# EAGLE board PCB_VARIABLE_DC_SUPPLY_ (EAGLE 9.6.2)
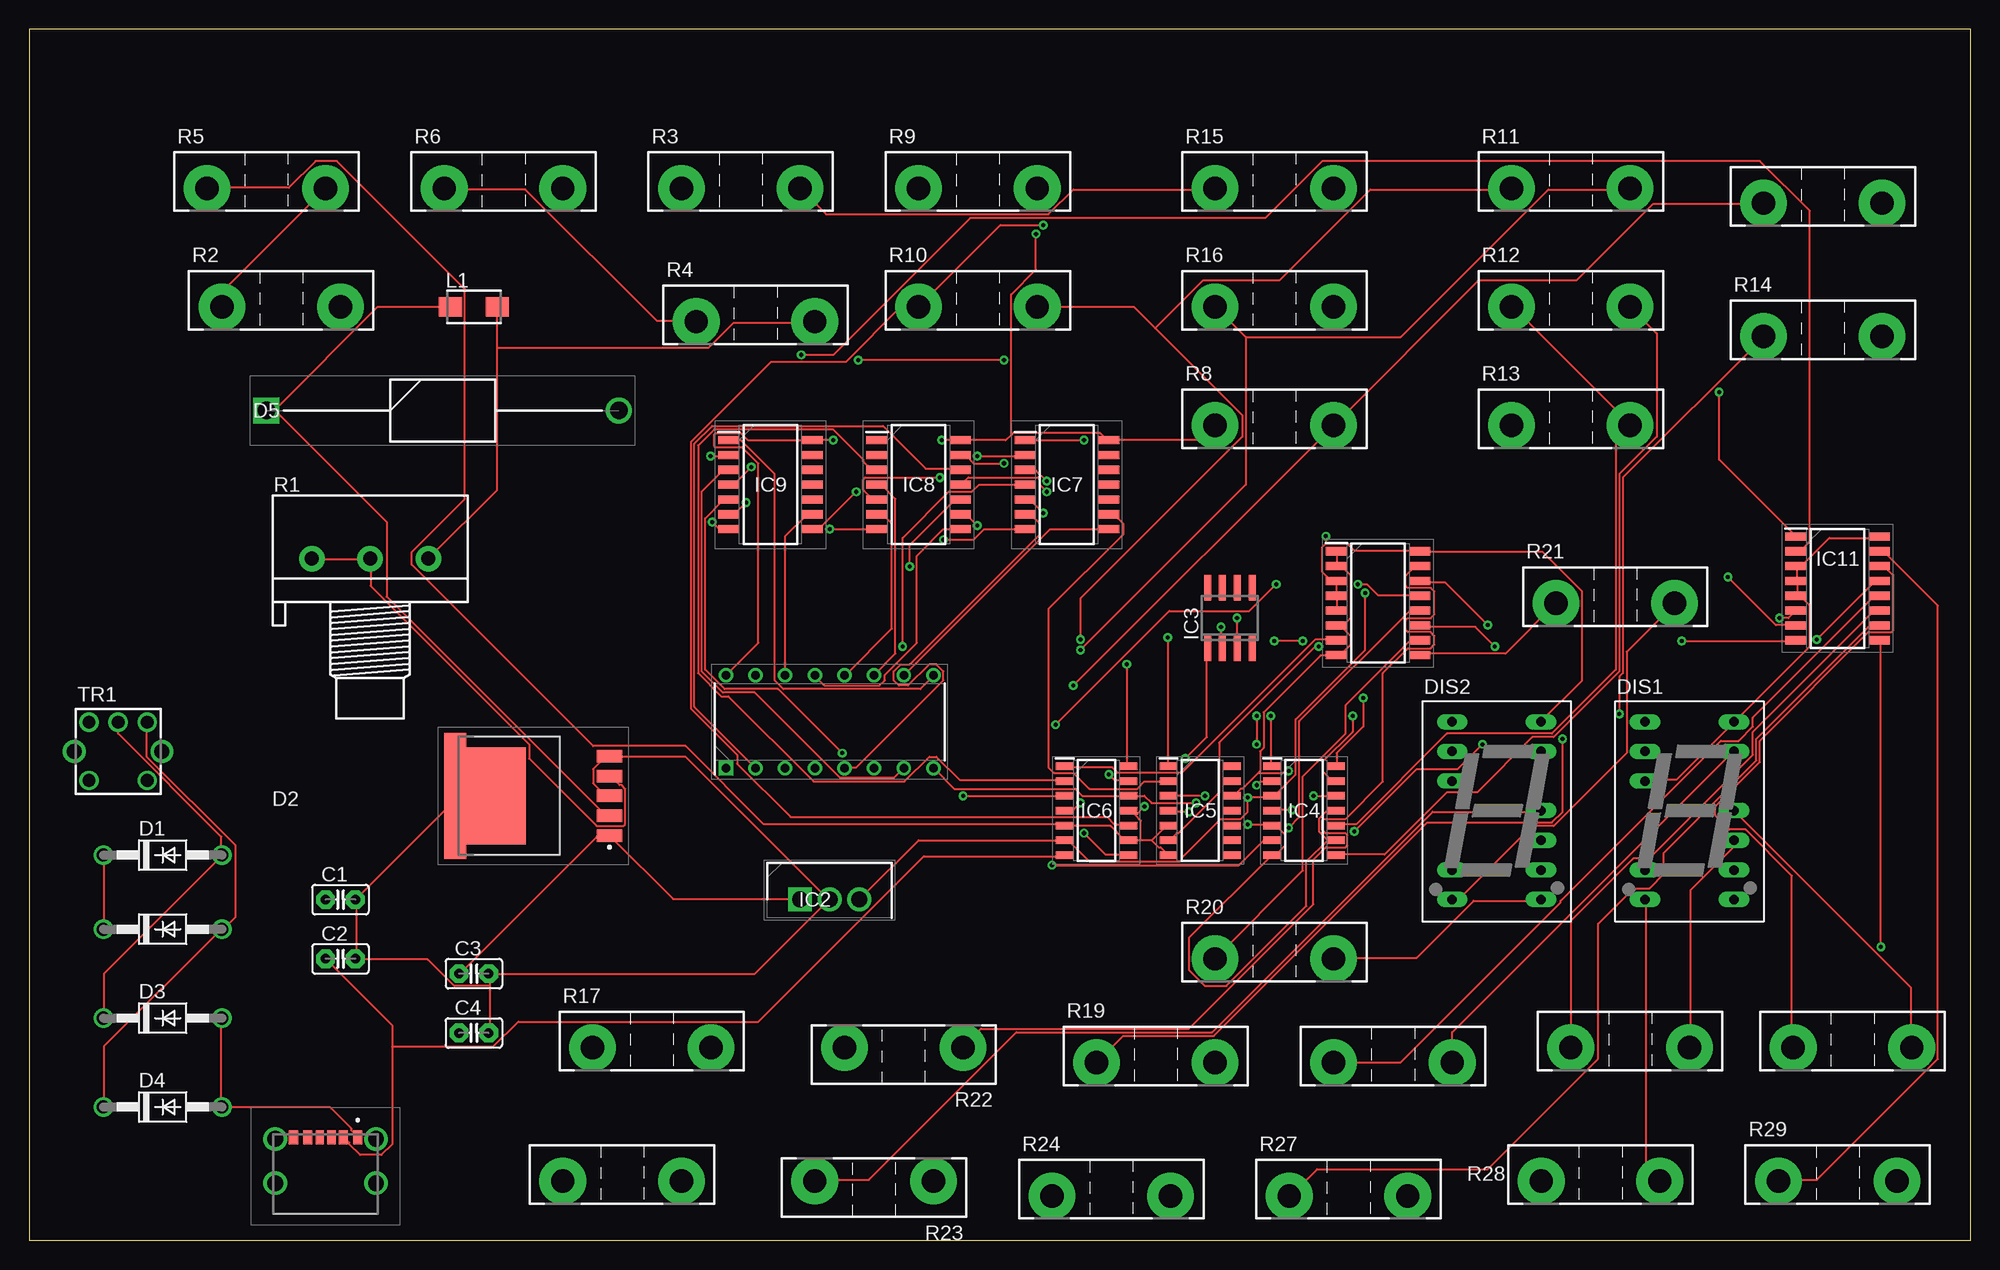
[diagram p0: board, top side]
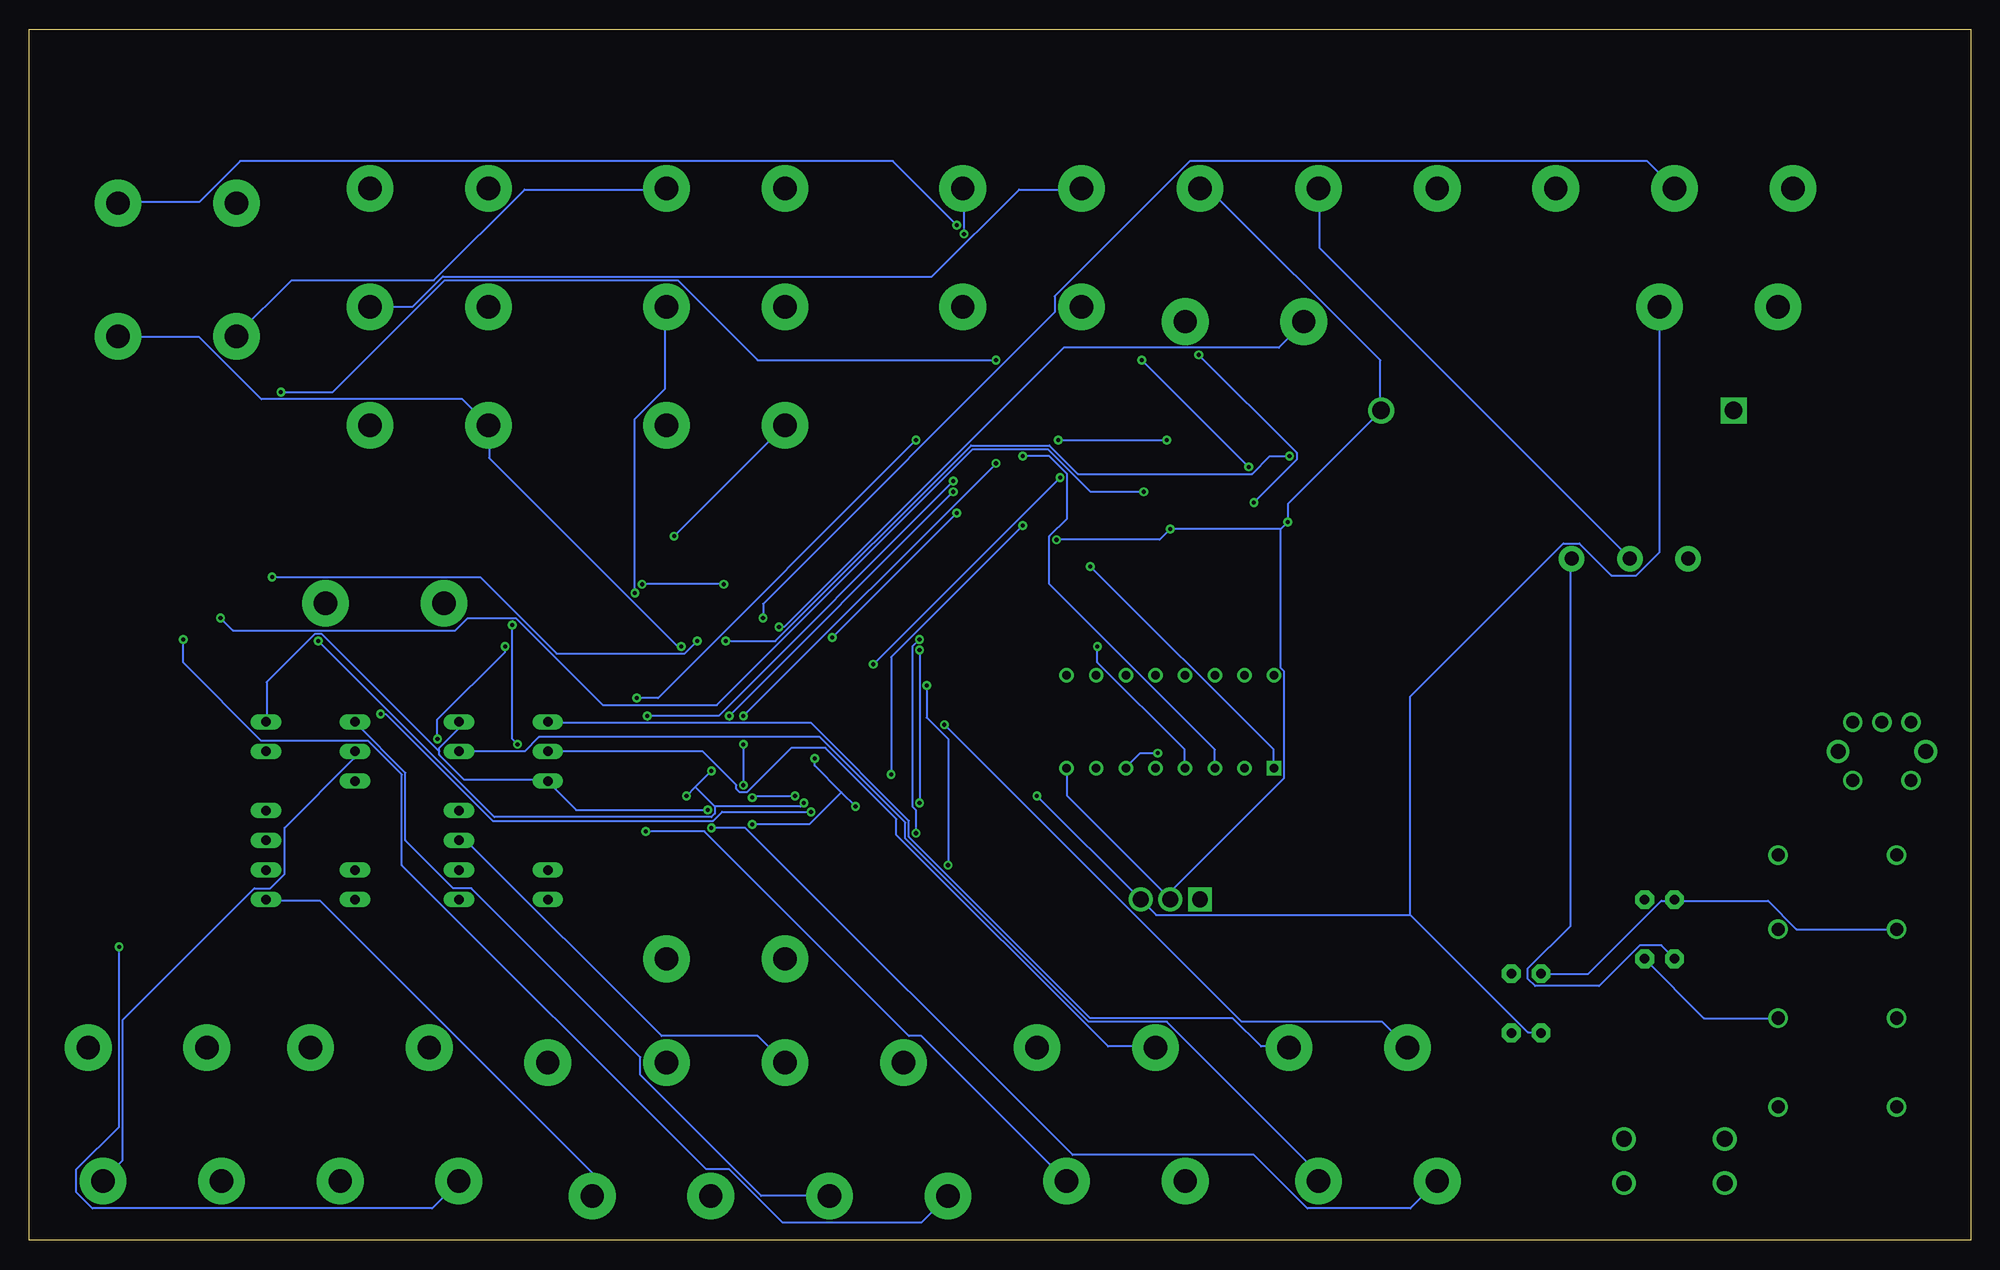
[diagram p1: board, bottom side, seen from below]

Size 166.35 x 103.81 mm. Coordinates in mm from the lower left corner, seen from the top.
Outline: 0,0 166.35,0 166.35,103.81 0,103.81 0,0
Copper layers (1*16): Top 0.035mm / dielectric 1.5mm / Bottom 0.035mm
Design rules "default": minimum track width 6mil, minimum drill 0.35mm, track to track 6mil, track to pad 6mil, pad to pad 6mil, via to via 6mil, smd to smd 6mil, copper to edge 40mil, drill to drill 6mil, minimum pad ring 10mil, minimum via ring 8mil, stop-mask expansion 4mil, vias tented up to drill 0mil, thermal gap 10mil

## Footprints (pad centres in the part's own frame; a part is rotated, then mirrored left to right if it is on the bottom)
C2.5-2 = drill 0.813 pad 1.6 octagon: 1 -1.27,0; 2 1.27,0
DO41-10 = drill 1.118: A 5.08,0; C -5.08,0
DIOAD3020W130L900D530 = drill 1.5 pad 2.25 square: 1 0,0 | drill 1.5 pad 2.25: 2 30.2,0
HDSP-I = drill 0.813 long: 1 -3.81,7.62; 2 -3.81,5.08; 3 -3.81,2.54; 6 -3.81,-5.08; 7 -3.81,-7.62; 8 3.81,-7.62; 9 3.81,-5.08; 10 3.81,-2.54; 11 3.81,0; 13 3.81,5.08; 14 3.81,7.62
LM2596SXADJ = smd 2.16 x 1.07: 1 6.545,-3.4; 2 6.545,-1.7; 3 6.545,0; 4 6.545,1.7; 5 6.545,3.4 | smd 1.91 x 10.8: T1 -6.67,0 | smd 5.08 x 8.33: T2 -3.175,0
TO254P470X1016X2019-3P = drill 1.37 pad 2.055 square: 1 0,0 | drill 1.37 pad 2.055: 2 2.535,0; 3 5.07,0
SO08 = smd 0.6 x 2.2: 1 -1.905,-2.6; 2 -0.635,-2.6; 3 0.635,-2.6; 4 1.905,-2.6; 5 1.905,2.6; 6 0.635,2.6; 7 -0.635,2.6; 8 -1.905,2.6
SOIC127P600X175-14N = smd 1.525 x 0.65: 1 -2.712,3.81; 2 -2.712,2.54; 3 -2.712,1.27; 4 -2.712,0; 5 -2.712,-1.27; 6 -2.712,-2.54; 7 -2.712,-3.81; 8 2.712,-3.81; 9 2.712,-2.54; 10 2.712,-1.27; 11 2.712,0; 12 2.712,1.27; 13 2.712,2.54; 14 2.712,3.81
SOIC127P780X200-14N = smd 1.825 x 0.7: 1 -3.562,3.81; 2 -3.562,2.54; 3 -3.562,1.27; 4 -3.562,0; 5 -3.562,-1.27; 6 -3.562,-2.54; 7 -3.562,-3.81; 8 3.562,-3.81; 9 3.562,-2.54; 10 3.562,-1.27; 11 3.562,0; 12 3.562,1.27; 13 3.562,2.54; 14 3.562,3.81
DIP794W53P254L1930H508Q16N = drill 0.73 pad 1.13 square: 1 -3.97,8.89 | drill 0.73 pad 1.13: 2 -3.97,6.35; 3 -3.97,3.81; 4 -3.97,1.27; 5 -3.97,-1.27; 6 -3.97,-3.81; 7 -3.97,-6.35; 8 -3.97,-8.89; 9 3.97,-8.89; 10 3.97,-6.35; 11 3.97,-3.81; 12 3.97,-1.27; 13 3.97,1.27; 14 3.97,3.81; 15 3.97,6.35; 16 3.97,8.89
SOIC127P780X200-16N = smd 1.825 x 0.7: 1 -3.562,4.445; 2 -3.562,3.175; 3 -3.562,1.905; 4 -3.562,0.635; 5 -3.562,-0.635; 6 -3.562,-1.905; 7 -3.562,-3.175; 8 -3.562,-4.445; 9 3.562,-4.445; 10 3.562,-3.175; 11 3.562,-1.905; 12 3.562,-0.635; 13 3.562,0.635; 14 3.562,1.905; 15 3.562,3.175; 16 3.562,4.445
TYPEC31M17 = smd 0.7 x 1.2: A5 -0.5,2.5; B5 0.5,2.5 | smd 0.76 x 1.2: A9 1.52,2.5; B9 -1.52,2.5 | smd 0.8 x 1.2: A12 2.75,2.5; B12 -2.75,2.5 | drill 1.346 pad 2: MH1 -4.32,-1.45; MH2 4.32,-1.45; MH3 4.32,2.35; MH4 -4.32,2.35
SM-B5 = smd 2 x 1.7: 1 -2,0; 2 2,0
3RP/1610N = drill 1.2 pad 2.184: 1 -5,0; 2 0,0; 3 5,0
TO-247-2V = drill 2 pad 4: 1 -5.08,0; 2 5.08,0
71-5 = drill 1.1: 1 2.5,-2.5; 2 2.5,2.5; 3 0,2.5; 4 -2.5,2.5; 5 -2.5,-2.5 | drill 1.3: S1 -3.75,0; S2 3.75,0

## Placement (x,y rotation side)
C1  4700 uF  [C2.5-2]  26.67,29.21 0 top
C2  220 uF  [C2.5-2]  26.67,24.13 0 top
C3  330 nF  [C2.5-2]  38.1,22.86 0 top
C4  100 nF  [C2.5-2]  38.1,17.78 0 top
D1  1N4004  [DO41-10]  11.43,33.02 0 top
D2  1N4004  [DO41-10]  11.43,26.67 0 top
D3  1N4004  [DO41-10]  11.43,19.05 0 top
D4  1N4004  [DO41-10]  11.43,11.43 0 top
D5  IN5822  [DIOAD3020W130L900D530]  20.32,71.12 0 top
DIS1  HD-E101  [HDSP-I]  142.24,36.83 0 top
DIS2  HD-E101  [HDSP-I]  125.73,36.83 0 top
IC1  LM2596SX-ADJ  [LM2596SXADJ]  43.18,38.1 0 top
IC2  LM7810ACT  [TO254P470X1016X2019-3P]  66.04,29.21 0 top
IC3  LM4558D  [SO08]  102.87,53.34 0 top
IC4  LM339D  [SOIC127P600X175-14N]  109.22,36.83 0 top
IC5  LM339D  [SOIC127P600X175-14N]  100.33,36.83 0 top
IC6  LM339D  [SOIC127P600X175-14N]  91.44,36.83 0 top
IC7  SN74HC04NSR  [SOIC127P780X200-14N]  88.9,64.77 0 top
IC8  SN74HC04NSR  [SOIC127P780X200-14N]  76.2,64.77 0 top
IC9  SN74HC04NSR  [SOIC127P780X200-14N]  63.5,64.77 0 top
IC10  SN74HC147N  [DIP794W53P254L1930H508Q16N]  68.58,44.45 90 top
IC11  SN74LS47NSRE4  [SOIC127P780X200-16N]  154.94,55.88 0 top
IC12  SN74LS47NSRE4  [SOIC127P780X200-16N]  115.57,54.61 0 top
J1  TYPE-C-31-M-17  [TYPEC31M17]  25.4,6.35 0 top
L1  33 uH  [SM-B5]  38.1,80.01 0 top
R1  [3RP/1610N]  29.21,58.42 0 top
R2  47KΩ  [TO-247-2V]  21.59,80.01 0 top
R3  1.5KΩ  [TO-247-2V]  60.96,90.17 0 top
R4  47KΩ  [TO-247-2V]  62.23,78.74 0 top
R5  47KΩ  [TO-247-2V]  20.32,90.17 0 top
R6  47KΩ  [TO-247-2V]  40.64,90.17 0 top
R7  10KΩ  [TO-247-2V]  153.67,88.9 0 top
R8  10KΩ  [TO-247-2V]  106.68,69.85 0 top
R9  10KΩ  [TO-247-2V]  81.28,90.17 0 top
R10  10KΩ  [TO-247-2V]  81.28,80.01 0 top
R11  10KΩ  [TO-247-2V]  132.08,90.17 0 top
R12  10KΩ  [TO-247-2V]  132.08,80.01 0 top
R13  10KΩ  [TO-247-2V]  132.08,69.85 0 top
R14  10KΩ  [TO-247-2V]  153.67,77.47 0 top
R15  10KΩ  [TO-247-2V]  106.68,90.17 0 top
R16  10KΩ  [TO-247-2V]  106.68,80.01 0 top
R17  220Ω  [TO-247-2V]  53.34,16.51 0 top
R18  220Ω  [TO-247-2V]  50.8,5.08 0 top
R19  220Ω  [TO-247-2V]  96.52,15.24 0 top
R20  220Ω  [TO-247-2V]  106.68,24.13 0 top
R21  220Ω  [TO-247-2V]  135.89,54.61 0 top
R22  220Ω  [TO-247-2V]  74.93,16.51 180 top
R23  220Ω  [TO-247-2V]  72.39,5.08 180 top
R24  220Ω  [TO-247-2V]  92.71,3.81 0 top
R25  220Ω  [TO-247-2V]  116.84,15.24 0 top
R26  220Ω  [TO-247-2V]  137.16,16.51 0 top
R27  220Ω  [TO-247-2V]  113.03,3.81 0 top
R28  220Ω  [TO-247-2V]  134.62,5.08 0 top
R29  220Ω  [TO-247-2V]  154.94,5.08 0 top
R30  220Ω  [TO-247-2V]  156.21,16.51 0 top
TR1  [71-5]  7.62,41.91 0 top

## Library data of the parts
C1-C4 = capacitor-wima
D1-D4 = diode
D5 = IN5822; DESCRIPTION: Axial Schottky Diode; HEIGHT: mm; MANUFACTURER_NAME: MULTICOMP; MANUFACTURER_PART_NUMBER: IN5822
DIS1 DIS2 = display-hp; OC_FARNELL: unknown; OC_NEWARK: unknown
IC1 = LM2596SX-ADJ; ARROW_PART_NUMBER: LM2596SX-ADJ; ARROW_PRICE-STOCK: https://www.arrow.com/en/products/lm2596sx-adj/texas-instruments?region=nac; DESCRIPTION: Switching Voltage Regulators SIMPLE SWITCHER 4.5V to 40V, 3A Low Component Count Step-Down Regulator 5-DDPAK/TO-263 -40 to 125; HEIGHT: 4.57mm; MANUFACTURER_NAME: Texas Instruments; MANUFACTURER_PART_NUMBER: LM2596SX-ADJ; MOUSER_PART_NUMBER: 926-LM2596SX-ADJ; MOUSER_PRICE-STOCK: https://www.mouser.co.uk/ProductDetail/Texas-Instruments/LM2596SX-ADJ?qs=X1J7HmVL2ZGoPloRewb2pw%3D%3D
IC2 = LM7810ACT; DESCRIPTION: IC REG LINEAR 10V 1A TO220-3; HEIGHT: 4.7mm; MANUFACTURER_NAME: onsemi; MANUFACTURER_PART_NUMBER: LM7810ACT; MOUSER_PART_NUMBER: 512-LM7810ACT; MOUSER_PRICE-STOCK: https://www.mouser.co.uk/ProductDetail/ON-Semiconductor-Fairchild/LM7810ACT?qs=VOMQJJE%252BBNk%252B1M98xHpUVA%3D%3D
IC3 = linear
IC4-IC6 = LM339D; ARROW_PART_NUMBER: LM339D; ARROW_PRICE-STOCK: https://www.arrow.com/en/products/lm339d/texas-instruments; DESCRIPTION: LM339DG4, Quad Comparator Open Collector 1.3s 4-kanalers 3, 5, 9, 12, 15, 18, 24, 28V 14-Pin SOIC; HEIGHT: 1.75mm; MANUFACTURER_NAME: Texas Instruments; MANUFACTURER_PART_NUMBER: LM339D; MOUSER_PART_NUMBER: 595-LM339D; MOUSER_PRICE-STOCK: https://www.mouser.co.uk/ProductDetail/Texas-Instruments/LM339D?qs=rshUhwi3fbZpzehCSIMPVw%3D%3D
IC7-IC9 = SN74HC04NSR; ARROW_PART_NUMBER: SN74HC04NSR; ARROW_PRICE-STOCK: https://www.arrow.com/en/products/sn74hc04nsr/texas-instruments?region=nac; DESCRIPTION: Hex Inverters; HEIGHT: 2mm; MANUFACTURER_NAME: Texas Instruments; MANUFACTURER_PART_NUMBER: SN74HC04NSR; MOUSER_PART_NUMBER: 595-SN74HC04NSR; MOUSER_PRICE-STOCK: https://www.mouser.co.uk/ProductDetail/Texas-Instruments/SN74HC04NSR?qs=mE33ZKBHyE7T4CYN%2FhoKqg%3D%3D
IC10 = SN74HC147N; DESCRIPTION: ENCODER, 16 Pin, Plastic, DIP; HEIGHT: 5.08mm; MANUFACTURER_NAME: Texas Instruments; MANUFACTURER_PART_NUMBER: SN74HC147N
IC11 IC12 = SN74LS47NSRE4; DESCRIPTION: IC BCD-7-SEG DECOD/DRVR 16SO; HEIGHT: 2mm; MANUFACTURER_NAME: Texas Instruments; MANUFACTURER_PART_NUMBER: SN74LS47NSRE4
J1 = TYPE-C-31-M-17; DESCRIPTION: USB Connectors 6 Receptacle 1 RoHS; HEIGHT: 3.26mm; MANUFACTURER_NAME: Korean Hroparts Elec; MANUFACTURER_PART_NUMBER: TYPE-C-31-M-17
L1 TR1 = inductor-neosid; OC_FARNELL: unknown; OC_NEWARK: unknown
R1 = pot
R2-R30 = resistor-power; OC_FARNELL: unknown; OC_NEWARK: unknown

## Nets
01: IC8.4 IC10.11
1V: IC5.4 R14.1 R15.2
02: IC8.6 IC10.12
2V: IC5.6 R13.1 R14.2
03: IC8.8 IC10.13
3V: IC4.10 R12.1 R13.2
04: IC8.10 IC10.1
4V: IC4.8 R9.1 R12.2
05: IC8.12 IC10.2
5V: DIS1.3 DIS1.14 DIS2.3 DIS2.14 IC4.4 IC7.14 IC8.14 IC9.14 IC10.16 IC11.3 IC11.4 IC11.5 IC11.16 IC12.3 IC12.4 IC12.5 IC12.16 R8.1 R9.2
06: IC7.2 IC10.3
6V: IC4.6 R7.1 R8.2
07: IC7.4 IC10.4
7V: IC6.10 R7.2 R10.1
08: IC7.6 IC10.5
8V: IC6.8 R10.2 R11.1
09: IC7.8 IC10.10
9V: IC6.4 R11.2 R16.1
GND: C1.2 C2.2 C3.2 C4.2 D3.A D4.A D5.2 IC1.3 IC1.5 IC1.T1 IC1.T2 IC2.2 IC4.12 IC5.12 IC6.12 IC7.7 IC8.7 IC9.7 IC10.8 IC11.8 IC12.1 IC12.2 IC12.6 IC12.8 J1.A12 R3.2 R15.1
N$1: D1.A D3.C TR1.3
N$2: D2.A D4.C TR1.2
N$3: D5.1 IC1.2 L1.1
N$4: C1.1 C3.1 D1.C D2.C IC1.1 IC2.1
N$5: IC3.3 R2.1 R5.2
N$6: IC1.4 R1.1 R1.2 R3.1
N$7: IC3.2 R4.1 R6.1
N$8: IC6.2 IC8.3
N$9: IC6.14 IC8.5
N$10: IC6.13 IC8.9
N$11: IC4.1 IC8.11
N$12: IC4.2 IC8.13
N$13: IC4.14 IC7.1
N$14: IC4.13 IC7.3
N$15: IC5.1 IC7.5
N$16: IC5.2 IC7.9
N$17: IC9.1 IC10.9
N$18: IC9.3 IC10.7
N$19: IC9.5 IC10.6
N$20: IC9.9 IC10.14
N$21: DIS2.1 R17.2
N$22: IC6.1 IC12.7
N$23: IC9.2 IC11.7
N$24: IC9.4 IC11.1
N$25: IC9.6 IC11.2
N$26: IC9.8 IC11.6
N$27: DIS2.13 R18.2
N$28: DIS2.10 R19.2
N$29: DIS2.8 R20.2
N$30: DIS2.2 R22.2
N$31: DIS2.7 R21.2
N$32: DIS2.11 R23.2
N$33: DIS1.10 R26.2
N$34: DIS1.1 R24.2
N$35: DIS1.13 R25.2
N$36: DIS1.8 R27.2
N$37: DIS1.7 R28.2
N$38: DIS1.2 R29.2
N$39: DIS1.11 R30.2
N$40: IC12.13 R17.1
N$41: IC12.12 R18.1
N$42: IC12.11 R19.1
N$43: IC12.10 R20.1
N$44: IC12.9 R21.1
N$45: IC12.15 R22.1
N$46: IC12.14 R23.1
N$47: IC11.13 R24.1
N$48: IC11.12 R25.1
N$49: IC11.11 R26.1
N$50: IC11.10 R27.1
N$51: IC11.9 R28.1
N$52: IC11.15 R29.1
N$53: IC11.14 R30.1
V1: C2.1 IC6.7 J1.A9 L1.2 R1.3 R4.2
V2: C4.1 IC2.3 IC4.3 IC5.3 IC6.3 IC6.6 R2.2 R16.2
V+: IC3.8
V-: IC3.4
VR: IC3.1 IC4.5 IC4.7 IC4.9 IC4.11 IC5.5 IC5.7 IC6.5 IC6.9 IC6.11 R5.1

## Tracks (layer width: path | path; a pad name or v marks a point on that pad's centre or on a via)
01
  Top 0.152: IC8.4 73,64.77 74.22,63.55 74.22,50.29 72.39,48.46 IC10.11
1V  (via drill 0.35)
  Top 0.152: v99.36,36.73 97.69,36.73 IC5.4 | v136.25,45.11 136.25,48.31 136.55,48.62 136.55,65.38 148.59,77.42 R14.1
  Bottom 0.152: v99.36,36.73 106.98,36.73 107.75,35.97 126.64,35.97 135.79,45.11 v136.25,45.11 | R15.2 111.86,90.07 123.9,90.07 131.67,82.3 143.87,82.3 148.59,77.57 R14.1
02
  Top 0.152: IC8.6 72.69,62.18 73.15,62.18 73.91,61.42 73.91,52.43 69.95,48.46 IC10.12
2V  (via drill 0.35)
  Top 0.152: v110.49,50.9 110.19,50.9 101.96,42.67 101.96,38.41 98.45,34.9 98.3,34.9 97.69,34.29 IC5.6
  Bottom 0.152: v110.49,50.9 110.8,50.9 126.95,67.06 126.95,69.8 R13.1 129.24,72.08 146.46,72.08 151.79,77.42 158.65,77.42 R14.2
03
  Top 0.152: IC8.8 78.33,60.96 76.05,58.67 76.05,51.21 73.3,48.46 73.3,48.01 72.85,47.55 68.12,47.55 67.36,48.31 IC10.13
3V
  Top 0.152: IC4.10 112.01,35.66 113.69,35.66 121.46,43.43 130.45,43.43 135.94,48.92 135.94,68.58 137.16,69.8 R13.2 137.16,69.95 127.1,80.01 R12.1
04  (via drill 0.35)
  Top 0.152: v75.44,57.76 75.44,59.59 79.25,63.4 79.7,63.4 IC8.10
  Bottom 0.152: v75.44,57.76 59.74,42.06 59.74,40.54 IC10.1
4V
  Top 0.152: R12.2 139.45,77.72 139.45,68.89 136.25,65.68 136.25,48.77 130.61,43.13 128.78,43.13 124.05,38.41 121.46,38.41 116.13,33.07 112.01,33.07 IC4.8
  Bottom 0.152: R12.2 133.5,80.01 130.91,82.6 89,82.6 81.53,90.07 76.2,90.07 R9.1
05
  Top 0.152: IC8.12 79.7,66.14 76.81,66.14 73.15,69.8 58.52,69.8 57,68.28 57,45.72 62.18,40.54 IC10.2
5V  (via drill 0.35)
  Top 0.152: IC11.16 158.5,60.2 154.23,60.2 151.94,57.91 151.49,57.91 IC11.3 151.49,57.76 151.49,56.54 IC11.4 151.49,56.39 151.49,55.32 IC11.5 151.49,55.17 151.79,55.17 152.55,54.41 152.55,50.9 146.15,44.5 DIS1.14 146,44.35 141.12,39.47 138.53,39.47 DIS1.3 | IC12.5 112.01,54.1 112.01,55.17 IC12.4 112.01,55.32 112.01,56.39 IC12.3 111.86,56.54 111.56,56.54 110.8,57.3 110.8,59.44 111.1,59.74 | 111.1,59.74 112.93,59.74 113.54,59.13 119.02,59.13 IC12.16 119.18,58.98 129.69,58.98 133.04,55.63 133.04,48.01 129.54,44.5 DIS2.14 | v108.2,36.88 106.53,36.88 IC4.4 | IC10.16 59.74,48.46 62.48,51.21 62.48,66.6 61.11,67.97 58.83,67.97 58.67,68.12 58.67,69.04 58.83,69.19 60.96,69.19 61.57,68.58 IC9.14 v68.89,68.58 | 84.12,69.04 84.28,69.19 91.75,69.19 92.35,68.58 IC7.14 100.28,68.58 101.5,69.8 R8.1 | 84.12,69.04 83.67,68.58 IC8.14 v78.18,68.58 | v86.26,86.26 86.26,83.21 84.12,81.08 84.12,69.04 | v111.1,60.35 111.1,59.74
  Bottom 0.152: v108.2,36.88 119.48,36.88 121.92,39.32 DIS2.3 121.92,39.47 129.08,39.47 131.22,41.61 131.22,41.91 | DIS2.14 129.54,43.89 131.22,42.22 131.22,41.91 | 131.22,41.91 141.28,51.97 141.88,51.97 146,47.85 146,44.5 DIS1.14 | v86.26,86.26 86.26,90.07 R9.2 | v78.18,68.58 v68.89,68.58 | R8.1 v111.1,60.35
06  (via drill 0.35)
  Top 0.152: v81.23,67.21 85.19,67.21 IC7.2
  Bottom 0.152: v81.23,67.21 78.94,67.21 77.42,65.68 77.42,61.87 78.94,60.35 78.94,56.24 64.77,42.06 IC10.3
6V  (via drill 0.35)
  Top 0.152: IC4.6 105.77,34.29 103.63,32.16 v87.63,32.16 | v89.46,47.55 R8.2 124.21,82.3 132.59,82.3 139.14,88.85 148.59,88.85 R7.1
  Bottom 0.152: v87.63,32.16 87.63,42.98 89.46,44.81 v89.46,47.55
07  (via drill 0.35)
  Top 0.152: IC7.4 81.38,64.77 80.77,64.16 78.79,64.16 74.83,60.2 v74.83,50.9
  Bottom 0.152: v74.83,50.9 74.83,49.53 67.36,42.06 67.36,40.54 IC10.4
7V  (via drill 0.35)
  Top 0.152: IC6.10 94.03,35.66 92.96,35.66 92.35,36.27 65.23,36.27 60.66,40.84 60.66,41.61 56.69,45.57 56.69,68.43 63.55,75.29 69.95,75.29 74.68,80.01 R10.1 83.21,87.02 v86.87,87.02
  Bottom 0.152: v86.87,87.02 92.35,92.51 148.28,92.51 151.79,89 158.65,89 R7.2
08
  Top 0.152: IC7.6 85.34,62.18 85.8,62.18 86.56,61.42 86.56,60.5 75.44,49.38 74.68,49.38 74.07,48.77 74.07,48.01 74.52,47.55 75.29,47.55 77.11,49.38 77.72,49.38 78.33,48.77 78.33,48.01 70.87,40.54 69.95,40.54 IC10.5
8V  (via drill 0.35)
  Top 0.152: v90.37,34.9 92.2,33.07 94.03,33.07 IC6.8 | v90.07,51.51 90.07,55.02 103.94,68.89 103.94,70.71 96.47,78.18 | 96.47,78.18 94.64,80.01 R10.2 | 96.47,78.18 100.58,82.3 107.14,82.3 114.91,90.07 126.95,90.07 R11.1
  Bottom 0.152: v90.37,34.9 90.37,36.88 90.68,37.19 90.68,50.9 v90.07,51.51
09
  Top 0.152: IC7.8 87.48,60.96 74.98,48.46 IC10.10
9V  (via drill 0.35)
  Top 0.152: v90.07,37.49 89.46,36.88 88.85,36.88 IC6.4 | v90.07,50.6 104.24,64.77 104.24,77.42 | 104.24,77.42 101.65,80.01 R16.1 | 104.24,77.42 117.5,77.42 130.15,90.07 137.16,90.07 R11.2
  Bottom 0.152: v90.07,50.6 v90.07,37.49
GND  (via drill 0.35)
  Top 0.152: IC9.7 59.13,60.96 v58.52,61.57 | v68.58,60.96 IC8.7 | IC7.7 81.84,60.96 80.92,60.05 v78.33,60.05 | R3.2 68.28,87.94 87.33,87.94 89.46,90.07 101.5,90.07 R15.1 | IC12.1 112.01,58.98 112.01,57.91 IC12.2 112.01,57.76 112.47,57.76 113.23,57 113.23,53.34 112.47,52.58 | 105.31,40.08 105.46,40.23 105.46,41.91 105.77,42.22 105.77,45.26 110.64,50.14 111.86,50.14 IC12.8 112.01,50.29 112.47,50.29 113.23,51.05 113.23,51.82 112.47,52.58 | 105.31,40.08 103.94,38.71 103.78,38.71 103.17,38.1 IC5.12 | v110.03,38.1 IC4.12 | v107.9,40.23 107.59,40.23 107.44,40.08 105.31,40.08 | v141.58,51.36 151.33,51.36 IC11.8 | 112.47,52.58 112.01,52.58 IC12.6 112.47,52.58 | IC10.8 77.57,40.39 79.25,38.71 89.61,38.71 90.22,38.1 IC6.12 95.56,38.1 96.16,37.49 v99.97,37.49 | IC1.3 49.38,38.1 48.31,39.17 48.31,40.39 49.38,41.45 49.68,41.45 IC1.5 49.84,41.45 56.24,41.45 68.43,29.26 IC2.2 68.43,29.11 62.18,22.86 39.47,22.86 | IC1.T2 IC1.T1 36.42,38.1 36.42,37.64 28.04,29.26 C1.2 28.04,29.11 28.04,24.23 C2.2 28.04,24.08 34.14,24.08 36.42,21.79 39.47,21.79 | J1.A12 28.04,8.99 27.58,9.45 27.58,9.6 25.76,11.43 D4.A 16.46,11.43 16.46,19.05 D3.A | 39.47,22.86 39.47,21.79 | 39.47,21.79 39.47,17.83 C4.2 | 39.47,22.86 C3.2
  Bottom 0.152: 59.13,60.96 v68.58,60.96 69.49,60.05 v78.33,60.05 | 59.13,60.96 v58.52,61.57 58.52,63.09 50.6,71.02 D5.2 50.6,71.17 50.6,75.44 65.23,90.07 65.99,90.07 R3.2 | v107.9,40.23 109.27,38.86 | 109.27,38.86 v110.03,38.1 | v141.58,51.36 126.49,36.27 107.9,36.27 107.59,36.58 107.59,37.19 | 109.27,38.86 107.59,37.19 | 68.89,29.57 68.58,29.26 IC2.2 68.89,29.57 | 68.89,29.57 77.42,38.1 77.42,40.39 IC10.8 | D3.A 22.86,19.05 C2.2 | 107.59,37.19 100.28,37.19 v99.97,37.49 | 59.13,60.96 59.13,49.07 58.83,48.77 58.83,39.62 68.89,29.57
N$1
  Top 0.152: TR1.3 7.62,43.43 16.46,34.59 16.46,33.07 D1.A 16.46,32.92 6.4,22.86 6.4,19.05 D3.C
N$2
  Top 0.152: TR1.2 10.06,44.35 10.06,41.45 17.68,33.83 17.68,27.74 16.61,26.67 D2.A 16.46,26.67 6.4,16.61 6.4,11.43 D4.C
N$3
  Top 0.152: L1.1 29.87,80.01 21.03,71.17 | 21.03,71.17 20.42,71.17 D5.1 21.03,71.17 | 21.03,71.17 30.63,61.57 30.63,55.17 49.38,36.42 49.68,36.42 IC1.2
N$4
  Top 0.152: D2.C 6.4,26.67 6.4,32.92 D1.C | C3.1 36.88,22.86 48.62,34.59 49.68,34.59 IC1.1 49.84,34.59 55.17,29.26 65.99,29.26 IC2.1
  Bottom 0.152: C3.1 32.77,22.86 26.52,29.11 25.45,29.11 C1.1 25.3,29.11 17.37,29.11 14.94,26.67 D2.C
N$5  (via drill 0.35)
  Top 0.152: v103.48,53.34 103.48,50.75 IC3.3 | R5.2 16.61,81.38 16.61,80.01 R2.1
  Bottom 0.152: v103.48,53.34 103.48,54.56 78.49,79.55 78.49,80.92 66.9,92.51 27.74,92.51 R5.2
N$6
  Top 0.152: IC1.4 49.84,39.78 50.6,39.01 50.75,39.01 51.05,38.71 51.05,35.66 50.9,35.51 48.62,35.51 42.82,41.3 42.82,42.52 29.26,56.08 29.26,58.37 R1.2 29.11,58.37 24.23,58.37 R1.1
  Bottom 0.152: R3.1 55.78,90.07 55.78,85.04 29.26,58.52 R1.2
N$7  (via drill 0.35)
  Top 0.152: v102.11,52.58 102.11,50.75 IC3.2 | R6.1 35.66,90.07 42.52,90.07 53.8,78.79 57.15,78.79 R4.1
  Bottom 0.152: v102.11,52.58 101.65,52.58 77.72,76.5 59.28,76.5 57.15,78.64 R4.1
N$8
  Top 0.152: IC6.2 88.7,39.47 79.7,39.47 77.72,41.45 77.11,41.45 74.98,39.32 67.21,39.32 59.89,46.63 59.28,46.63 57.3,48.62 57.3,68.12 58.67,69.49 68.89,69.49 71.48,66.9 71.48,66.75 72.08,66.14 72.54,66.14 IC8.3
N$9  (via drill 0.35)
  Top 0.152: v94.03,49.38 94.03,40.69 IC6.14 | v78.03,65.38 71.63,65.38 71.48,65.23 71.48,64.31 72.24,63.55 72.54,63.55 IC8.5
  Bottom 0.152: v78.03,65.38 v94.03,49.38
N$10  (via drill 0.35)
  Top 0.152: v92.51,39.93 92.96,39.47 94.03,39.47 IC6.13 | v81.23,61.27 80.31,62.18 79.86,62.18 IC8.9
  Bottom 0.152: v92.51,39.93 92.51,49.99 v81.23,61.27
N$11  (via drill 0.35)
  Top 0.152: v106.38,44.96 106.38,40.69 IC4.1 | v87.17,64.16 86.56,64.77 86.56,65.23 86.41,65.38 80.47,65.38 79.86,64.77 IC8.11
  Bottom 0.152: v87.17,64.16 v106.38,44.96
N$12  (via drill 0.35)
  Top 0.152: v105.16,39.01 105.46,39.32 106.38,39.32 IC4.2 | v105.16,44.96 v105.16,42.52 | v83.52,66.6 80.92,66.6 80.31,67.21 79.86,67.21 IC8.13
  Bottom 0.152: v105.16,42.52 v105.16,39.01 | v83.52,66.6 v105.16,44.96
N$13  (via drill 0.35)
  Top 0.152: v114.3,46.48 114.3,44.04 112.01,41.76 112.01,40.69 IC4.14 | IC7.1 v90.37,68.58
  Bottom 0.152: v114.3,46.48 112.47,46.48 v90.37,68.58
N$14  (via drill 0.35)
  Top 0.152: v113.39,44.96 113.39,43.59 110.8,41 110.8,40.23 111.56,39.47 111.86,39.47 IC4.13 | v87.17,65.08 86.26,65.99 85.34,65.99 IC7.3
  Bottom 0.152: v113.39,44.96 107.29,44.96 v87.17,65.08
N$15  (via drill 0.35)
  Top 0.152: v97.54,51.66 97.54,40.69 IC5.1 | v86.87,62.33 85.8,63.4 85.34,63.4 IC7.5
  Bottom 0.152: v86.87,62.33 v97.54,51.66
N$16
  Top 0.152: IC5.2 97.54,39.32 95.56,39.32 94.94,38.71 90.83,38.71 89.46,40.08 87.78,40.08 87.33,40.54 87.33,54.1 93.73,60.5 93.73,61.42 92.96,62.18 92.51,62.18 IC7.9
N$17
  Top 0.152: IC9.1 60.96,68.58 63.86,65.68 63.86,48.01 64.62,47.24 76.35,47.24 77.42,48.31 IC10.9
N$18
  Top 0.152: IC9.3 59.89,65.99 59.44,65.99 57.61,64.16 57.61,48.77 59.44,46.94 62.18,46.94 69.49,39.62 74.07,39.62 74.83,40.39 IC10.7
N$19  (via drill 0.35)
  Top 0.152: v69.65,41.76 64.16,47.24 59.59,47.24 57.91,48.92 57.91,61.87 59.44,63.4 59.89,63.4 IC9.5
  Bottom 0.152: v69.65,41.76 71.17,41.76 72.39,40.54 IC10.6
N$20
  Top 0.152: IC10.14 64.77,60.35 66.6,62.18 67.06,62.18 IC9.9
N$21
  Bottom 0.152: DIS2.1 121.92,44.35 99.36,44.35 90.98,35.97 90.98,34.59 75.44,19.05 63.25,19.05 60.81,16.61 58.52,16.61 R17.2
N$22
  Top 0.152: IC6.1 88.85,40.54 92.81,40.54 93.27,40.08 98.75,40.08 110.19,51.51 111.86,51.51 IC12.7
N$23  (via drill 0.35)
  Top 0.152: v58.37,67.21 59.89,67.21 IC9.2 | v109.12,51.36 v106.68,51.36 | v145.54,56.84 149.66,52.73 151.33,52.73 IC11.7
  Bottom 0.152: v58.37,67.21 60.05,67.21 61.57,65.68 76.5,65.68 78.94,68.12 85.65,68.12 102.41,51.36 v106.68,51.36 | v109.12,51.36 110.19,50.29 121.16,50.29 127.71,56.84 v145.54,56.84
N$24  (via drill 0.35)
  Top 0.152: IC9.4 60.35,64.77 v61.87,66.29 | v83.52,75.44 v71.02,75.44 | v144.78,72.7 144.78,66.9 151.33,60.35 IC11.1
  Bottom 0.152: v71.02,75.44 v61.87,66.29 | v83.52,75.44 103.94,75.44 110.8,82.3 130.76,82.3 140.36,72.7 v144.78,72.7
N$25  (via drill 0.35)
  Top 0.152: v61.42,63.25 60.5,62.33 60.05,62.33 IC9.6 | v66.14,75.89 68.89,75.89 80.62,87.63 105.92,87.63 110.8,92.51 148.28,92.51 152.55,88.24 152.55,59.89 151.79,59.13 151.49,59.13 IC11.2
  Bottom 0.152: v61.42,63.25 57.76,66.9 57.76,67.51 v66.14,75.89
N$26  (via drill 0.35)
  Top 0.152: IC9.8 67.67,60.96 v70.87,64.16 | v149.96,53.34 150.72,53.34 151.33,53.95 IC11.6
  Bottom 0.152: v70.87,64.16 75.44,64.16 79.1,67.82 85.5,67.82 107.44,45.87 117.2,45.87 124.66,53.34 128.78,53.34 129.84,52.27 148.9,52.27 v149.96,53.34
N$27
  Bottom 0.152: DIS2.13 123.9,41.91 122.68,43.13 98.6,43.13 91.29,35.81 91.29,34.44 75.59,18.75 68.89,18.75 55.93,5.79 55.93,5.18 R18.2
N$28
  Bottom 0.152: DIS2.10 128.93,34.29 112.17,17.53 103.94,17.53 101.65,15.24 R19.2
N$29
  Top 0.152: DIS2.8 129.54,29.11 123.75,29.11 118.87,24.23 111.86,24.23 R20.2
N$30
  Bottom 0.152: DIS2.2 108.66,41.91 105.77,39.01 105.77,38.71 105.46,38.41 104.85,38.41 101.04,42.22 98.15,42.22 92.05,36.12 92.05,34.75 73.91,16.61 69.95,16.61 R22.2
N$31
  Top 0.152: DIS2.7 121.92,29.26 122.53,29.26 128.78,35.51 130.61,35.51 136.85,41.76 136.85,50.44 140.97,54.56 R21.2
N$32
  Top 0.152: DIS2.11 129.54,36.73 120.24,36.73 101.35,17.83 84.58,17.83 71.93,5.18 67.36,5.18 R23.2
N$33
  Top 0.152: DIS1.10 146,34.29 146,33.68 142.34,30.02 142.34,16.61 R26.2
N$34
  Bottom 0.152: R24.2 103.63,3.81 114,14.17 114,15.7 128.47,30.18 130,30.18 134.11,34.29 134.11,40.08 138.38,44.35 DIS1.1
N$35
  Top 0.152: R25.2 121.92,17.83 146,41.91 DIS1.13
N$36
  Bottom 0.152: R27.2 118.11,5.79 141.43,29.11 146,29.11 DIS1.8
N$37
  Top 0.152: R28.2 138.53,6.25 138.53,29.11 DIS1.7
N$38
  Bottom 0.152: DIS1.2 138.53,41.91 138.53,41.3 144.47,35.36 144.47,31.39 145.69,30.18 147.07,30.18 158.34,18.9 158.34,6.86 160.02,5.18 R29.2
N$39
  Top 0.152: DIS1.11 161.24,21.64 161.24,16.61 R30.2
N$40  (via drill 0.35)
  Top 0.152: v113.84,56.24 114.61,56.24 115.52,55.32 119.02,55.32 IC12.13 | v106.83,56.24 104.55,53.95 97.69,53.95 v87.94,44.2
  Bottom 0.152: v106.83,56.24 v113.84,56.24 | v87.94,44.2 62.48,18.75 50.44,18.75 48.31,16.61 R17.1
N$41  (via drill 0.35)
  Top 0.152: v107.9,35.36 108.81,36.27 108.81,44.5 118.26,53.95 119.02,53.95 IC12.12
  Bottom 0.152: v107.9,35.36 105,35.36 76.96,7.32 61.42,7.32 56.84,2.74 48.01,2.74 45.72,5.03 R18.1
N$42  (via drill 0.35)
  Top 0.152: v125.58,50.9 123.9,52.58 119.18,52.58 IC12.11 | v131.37,42.98 131.37,36.73 130.45,35.81 119.79,35.81 101.5,17.53 93.73,17.53 R19.1
  Bottom 0.152: v125.58,50.9 125.58,50.44 131.37,44.65 v131.37,42.98
N$43
  Top 0.152: IC12.10 119.02,51.36 118.26,51.36 112.78,45.87 112.78,43.43 109.12,39.78 109.12,31.7 101.65,24.23 R20.1
N$44
  Top 0.152: R21.1 126.49,50.29 119.18,50.29 IC12.9
N$45
  Top 0.152: IC12.15 119.02,57.76 118.72,57.76 117.96,57 117.96,56.08 118.11,55.93 120.09,55.93 120.4,55.63 120.4,53.64 120.09,53.34 118.11,53.34 117.96,53.19 117.96,52.27 118.11,52.12 120.09,52.12 120.4,51.82 120.4,51.05 120.09,50.75 118.11,50.75 115.98,48.62 115.98,39.32 112.78,36.12 110.95,36.12 110.8,35.97 110.8,35.2 111.1,34.9 112.78,34.9 112.93,34.75 112.93,33.83 112.78,33.68 111.1,33.68 110.03,32.61 110.03,28.8 99.36,18.14 81.53,18.14 80.01,16.61 R22.1
N$46  (via drill 0.35)
  Top 0.152: v124.97,52.73 121.31,56.39 119.18,56.39 IC12.14 | v124.51,42.52 122.38,40.39 118.87,40.39 v113.54,35.05
  Bottom 0.152: v124.97,52.73 124.97,42.98 v124.51,42.52 | v113.54,35.05 108.51,35.05 90.98,17.53 89.92,17.53 R23.1
N$47  (via drill 0.35)
  Top 0.152: v153.16,51.51 158.04,56.39 158.5,56.39 IC11.13
  Bottom 0.152: v153.16,51.51 153.16,49.53 146.46,42.82 137.31,42.82 134.42,39.93 134.42,32.16 108.36,6.1 106.38,6.1 101.8,1.52 89.92,1.52 R24.1
N$48
  Top 0.152: R25.1 117.5,15.24 131.22,28.96 131.22,29.11 144.93,42.82 146.46,42.82 147.68,44.04 147.68,44.81 158.04,55.17 158.5,55.17 IC11.12
N$49
  Top 0.152: IC11.11 158.5,53.95 158.04,53.95 147.68,43.59 147.68,41.61 138.84,32.77 137.47,32.77 132.13,27.43 132.13,16.61 R26.1
N$50
  Top 0.152: IC11.10 158.5,52.58 157.58,52.58 147.98,42.98 147.98,41.15 140.06,33.22 140.06,31.39 138.84,30.18 137.47,30.18 134.42,27.13 134.42,15.54 124.97,6.1 110.34,6.1 108.05,3.81 R27.1
N$51  (via drill 0.35)
  Top 0.152: v158.65,25.15 158.65,51.36 IC11.9
  Bottom 0.152: v158.65,25.15 158.65,9.75 162.31,6.1 162.31,4.12 160.93,2.74 131.83,2.74 129.54,5.03 R28.1
N$52
  Top 0.152: IC11.15 158.65,58.98 158.95,58.98 163.53,54.41 163.53,15.54 153.16,5.18 149.96,5.18 R29.1
N$53
  Top 0.152: IC11.14 158.65,57.76 158.95,57.76 159.72,57 159.72,52.27 159.56,52.12 157.58,52.12 148.28,42.82 148.28,41 144.47,37.19 144.47,36.42 145.69,35.2 147.07,35.2 151.03,31.24 151.03,16.61 R30.1
V1
  Top 0.152: 40.08,76.5 40.08,64.31 34.29,58.52 R1.3 | 40.08,76.5 40.08,80.01 L1.2 | 40.08,76.5 58.22,76.5 60.35,78.64 67.21,78.64 R4.2 | 31.09,16.61 31.09,18.44 C2.1 | 31.09,16.61 31.09,8.23 30.18,7.32 28.35,7.32 27.43,8.23 27.43,8.38 26.98,8.84 J1.A9 | 31.09,16.61 39.78,16.61 41.91,18.75 62.48,18.75 76.66,32.92 88.7,32.92 IC6.7
  Bottom 0.152: R1.3 34.29,58.37 34.29,26.98 37.95,23.32 37.95,22.4 37.34,21.79 31.85,21.79 28.35,25.3 26.52,25.3 25.45,24.23 C2.1
V2  (via drill 0.35)
  Top 0.152: v100.74,38.1 IC5.3 | IC2.3 71.17,29.26 76.2,34.29 IC6.6 89,34.29 90.83,32.46 98.6,32.46 98.75,32.61 98.75,32.77 102.11,36.12 103.78,36.12 104.39,36.73 v104.39,37.95 106.22,37.95 106.38,38.1 IC4.3 106.68,38.1 108.51,39.93 108.51,44.65 114.45,50.6 v114.45,55.47 | v80.01,38.1 IC6.3
  Bottom 0.152: v100.74,38.1 104.24,38.1 v104.39,37.95 | v80.01,38.1 71.17,29.26 IC2.3 71.02,29.11 69.8,27.89 48.01,27.89 | 48.01,27.89 37.95,17.83 36.88,17.83 C4.1 | R2.2 26.67,58.98 28.65,57 30.79,57 33.53,59.74 34.9,59.74 48.01,46.63 48.01,27.89 | v114.45,55.47 114.45,70.41 111.86,73 111.86,80.01 R16.2
VR  (via drill 0.35)
  Top 0.152: 111.25,34.29 IC4.9 | 111.25,34.29 110.49,35.05 110.49,36.12 111.1,36.73 111.86,36.73 IC4.11 | 96.16,34.29 95.25,34.29 | 95.25,34.29 IC6.9 93.88,34.29 92.66,35.51 88.85,35.51 IC6.5 88.7,35.66 62.94,35.66 56.24,42.37 48.31,42.37 32.77,57.91 32.77,58.98 37.34,63.55 37.34,81.53 26.36,92.51 24.54,92.51 22.25,90.22 15.24,90.22 R5.1 | 96.16,34.29 97.54,35.66 IC5.5 | 96.16,34.29 96.77,33.68 96.93,33.68 97.54,33.07 IC5.7 | 94.79,36.42 95.25,35.97 95.25,34.29 | 94.79,36.42 94.49,36.73 94.18,36.73 IC6.11 | v99.06,41.3 100.89,43.13 100.89,50.6 IC3.1 | 94.79,36.42 v95.56,37.19 | v104.39,35.66 106.38,35.66 IC4.5 106.53,35.51 106.83,35.51 107.59,34.75 107.59,33.83 106.83,33.07 106.53,33.07 IC4.7 106.38,32.92 99.36,25.91 99.36,23.16 100.74,21.79 102.56,21.79 109.42,28.65 109.42,32.46 111.25,34.29
  Bottom 0.152: v99.06,41.3 99.06,40.69 96.77,38.41 | v95.56,37.19 96.77,38.41 | v104.39,35.66 99.52,35.66 96.77,38.41